# Altium PCB AVR_KBD.PcbDoc
Units mil, origin at the board's own origin, x right, y up, seen from the top; angles counter-clockwise.
Board outline 6000 x 4000 mil, 2 copper layers (Top Layer, Bottom Layer); 64 components, 79 nets, 255 pads, 0 vias.
Unrouted connection lines stored in the file: 164.
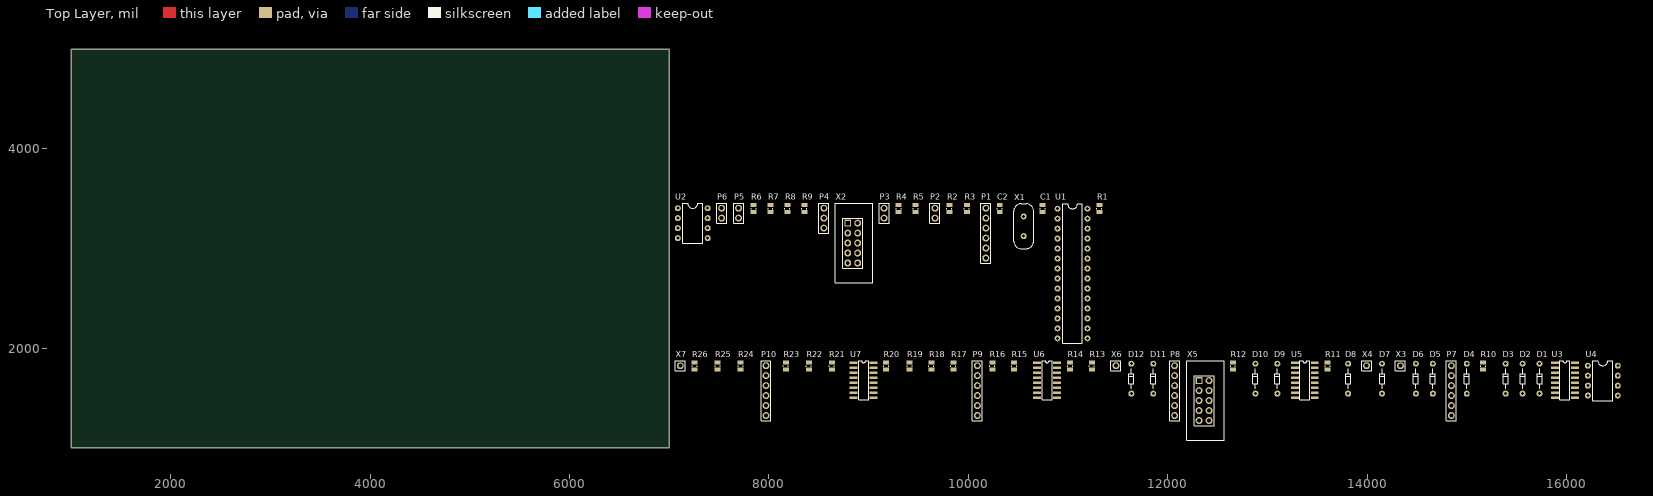
[diagram p0: Top Layer view]
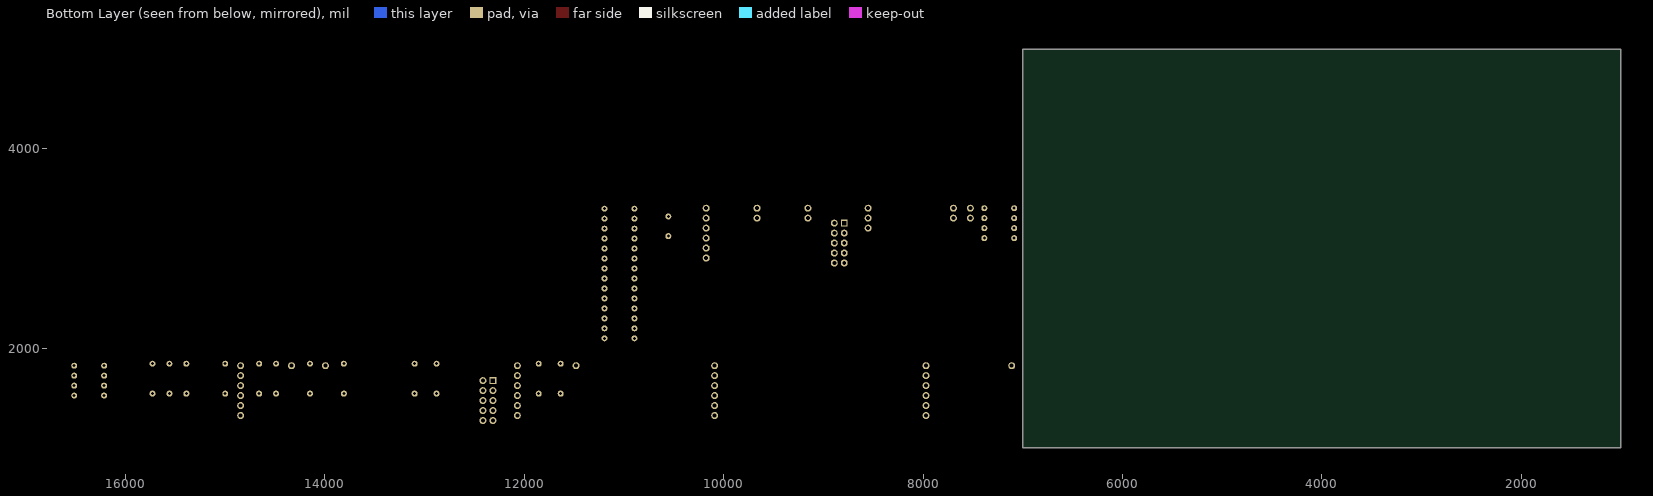
[diagram p1: Bottom Layer view, seen from below]

## Layer stack, top to bottom
Top Solder: solder mask 0.4, Solder Resist, Dk 3.5
Top Layer: signal copper 1.4
Dielectric1: dielectric 12.6, FR-4, Dk 4.8
Bottom Layer: signal copper 1.4
Bottom Solder: solder mask 0.4, Solder Resist, Dk 3.5

## Board outline
1000,1000 7000,1000 7000,5000 1000,5000

## Design rules (kind name [scope] priority, off if disabled: settings)
Clearance [All] p1: gap=10
FabricationTestPointUsage TestPointUsage [All] p1: valid=0 allowmultiple=FALSE
FabricationTestpoint Testpoint [All] p1: side=3 testpointundercomponent=TRUE minsize=40 maxsize=100 preferedsize=60 minholesize=0 maxholesize=40 preferedholesize=32 testpointgrid=1 allowsidetop=TRUE allowsidebottom=TRUE usegrid=TRUE gridtolerance=0.01
PolygonConnect [All] p1: connectstyle=Relief reliefconductorwidth=10 reliefentries=4 polygonreliefangle="90 Angle" airgapwidth=10
RoomDefinition AVR_MAIN [InComponentClass('AVR_MAIN')] p1: confinementstyle=ConfineIn formatcopy=TRUE lockcomponents=FALSE outline 7045,2035 11390,2035 11390,3565 7045,3565
RoomDefinition AVR_KBD [InComponentClass('AVR_KBD')] p2: confinementstyle=ConfineIn formatcopy=TRUE lockcomponents=FALSE outline 7045,1065 16555,1065 16555,1985 7045,1985
RoutingVias [All] p1: holewidth=28 width=50 viastyle="Through Hole" minholewidth=28 minwidth=50 maxholewidth=28 maxwidth=50
SilkToSolderMaskClearance SilkscreenOverComponentPads [IsPad] p1: minsilkscreentomaskgap=10 clearancetoexposedcopper=TRUE
SolderMaskExpansion [All] p1: expansion=4
Width [All] p1: maxlimit=10 minlimit=10 preferedwidth=10
26 further rules are at their usual default settings.

## Classes and differential pairs
component class AVR_MAIN: C1 C2 P1 P2 P3 P4 P5 P6 R1 R2 R3 R4 R5 R6 R7 R8 R9 U1 U2 X1 X2
component class AVR_KBD: D1 D2 D3 D4 D5 D6 D7 D8 D9 D10 D11 D12 P7 P8 P9 P10 R10 R11 R12 R13 R14 R15 R16 R17 R18 R19 R20 R21 R22 R23 R24 R25 R26 U3 U4 U5 U6 U7 X3 X4 X5 X6 X7

## Components (designator, comment, footprint, x,y, rotation, side; value= is the part's Value field where it differs from the comment)
C1 "Capacitor" 0805_Capacitor 10745,3440 r0 top
C2 "Capacitor" 0805_Capacitor 10315,3440 r0 top
D1 "Diode" DO35 15730,1545 r90 top
D2 "Diode" DO35 15560,1545 r90 top
D3 "Diode" DO35 15390,1545 r90 top
D4 "Diode" DO35 15000,1545 r90 top
D5 "Diode" DO35 14660,1545 r90 top
D6 "Diode" DO35 14490,1545 r90 top
D7 "Diode" DO35 14150,1545 r90 top
D8 "Diode" DO35 13810,1545 r90 top
D9 "Diode" DO35 13100,1545 r90 top
D10 "Diode" DO35 12880,1545 r90 top
D11 "Diode" DO35 11855,1545 r90 top
D12 "Diode" DO35 11635,1545 r90 top
P1 "SIL-CONN-6" SIL-CONN-6 10175,3405 r0 top
P2 "SIL-CONN-2" SIL-CONN-2 9665,3405 r0 top
P3 "SIL-CONN-2" SIL-CONN-2 9155,3405 r0 top
P4 "SIL-CONN-3" SIL-CONN-3 8550,3405 r0 top
P5 "SIL-CONN-2" SIL-CONN-2-jumper 7695,3405 r0 top
P6 "SIL-CONN-2" SIL-CONN-2 7525,3405 r0 top
P7 "KBD1" SIL-CONN-6 14845,1825 r0 top
P8 "KBD2" SIL-CONN-6 12070,1825 r0 top
P9 "LEDS1" SIL-CONN-6 10090,1825 r0 top
P10 "LEDS2" SIL-CONN-6 7970,1825 r0 top
R1 "Resistor" 0805_Resistor 11315,3440 r0 top
R2 "Resistor" 0805_Resistor 9810,3440 r0 top
R3 "Resistor" 0805_Resistor 9985,3440 r0 top
R4 "Resistor" 0805_Resistor 9300,3440 r0 top
R5 "Resistor" 0805_Resistor 9470,3440 r0 top
R6 "Resistor" 0805_Resistor 7845,3440 r0 top
R7 "Resistor" 0805_Resistor 8015,3440 r0 top
R8 "Resistor" 0805_Resistor 8185,3440 r0 top
R9 "Resistor" 0805_Resistor 8355,3440 r0 top
R10 "Resistor" 0805_Resistor 15165,1860 r0 top
R11 "Resistor" 0805_Resistor 13605,1860 r0 top
R12 "Resistor" 0805_Resistor 12655,1860 r0 top
R13 "Resistor" 0805_Resistor 11240,1860 r0 top
R14 "Resistor" 0805_Resistor 11020,1860 r0 top
R15 "Resistor" 0805_Resistor 10460,1860 r0 top
R16 "Resistor" 0805_Resistor 10240,1860 r0 top
R17 "Resistor" 0805_Resistor 9850,1860 r0 top
R18 "Resistor" 0805_Resistor 9630,1860 r0 top
R19 "Resistor" 0805_Resistor 9410,1860 r0 top
R20 "Resistor" 0805_Resistor 9175,1860 r0 top
R21 "Resistor" 0805_Resistor 8630,1860 r0 top
R22 "Resistor" 0805_Resistor 8400,1860 r0 top
R23 "Resistor" 0805_Resistor 8170,1860 r0 top
R24 "Resistor" 0805_Resistor 7715,1860 r0 top
R25 "Resistor" 0805_Resistor 7485,1860 r0 top
R26 "Resistor" 0805_Resistor 7255,1860 r0 top
U1 "ATMEGA8-PU" DIP28_Narrow 10895,3400 r0 top
U2 "24LC16B" DIP8 7085,3405 r0 top
U3 "74HC595" SOIC16 15885,1855 r0 top
U4 "ATTINY13A-PU" DIP8 16215,1825 r0 top
U5 "74HC595" SOIC16 13275,1855 r0 top
U6 "74HC595" SOIC16 10690,1855 r0 top
U7 "74HC595" SOIC16 8850,1855 r0 top
X1 "Crystal" HC49 10555,3325 r0 top
X2 "DIL-CONN-10" DIL-CONN-IDC-10 8790,3255 r0 top
X3 "KBD" SIL-CONN-1 14335,1825 r0 top
X4 "UART" SIL-CONN-1 13995,1825 r0 top
X5 "ISP" DIL-CONN-IDC-10 12315,1675 r0 top
X6 "MODE" SIL-CONN-1 11480,1825 r0 top
X7 "LED3" SIL-CONN-1 7110,1825 r0 top

## Footprints (in the part's own frame and the unit in brackets; to place one, negate y for a bottom-side part, rotate by r counter-clockwise, add the part's x,y. Pads: shape width x height; smd on the part's side, far side on the other; paste and mask are expansions set on the pad)
0805_Capacitor [mil]
  rect 60x40 smd: 1(0,-5) 2(0,-75)
  silkscreen extent -25,-45 25,-35, body extent -25,-79 25,-1, height 31
0805_Resistor [mil]
  rect 60x40 smd: 1(0,-5) 2(0,-75)
  silkscreen extent -25,-45 25,-35, body extent -25,-79 25,-1, height 31
DIL-CONN-IDC-10 [mil]
  rect 70x70 hole 40 square: 1(0,0)
  round 70 hole 40: 2(100,0) 3(0,-100) 4(100,-100) 5(0,-200) 6(100,-200) 7(0,-300) 8(100,-300) 9(0,-400) 10(100,-400)
  silkscreen extent -125,-600 250,200, body extent -123,-600 235,200, height 366
DIP8 [mil]
  round 60 hole 30: 1(0,0) 2(0,-100) 3(0,-200) 4(0,-300) 5(300,-300) 6(300,-200) 7(300,-100) 8(300,0)
  silkscreen extent 50,-350 250,50, body extent -4,-344 304,46, height 180
DIP28_Narrow [mil]
  round 60 hole 30: 1(0,0) 2(0,-100) 3(0,-200) 4(0,-300) 5(0,-400) 6(0,-500) 7(0,-600) 8(0,-700) 9(0,-800) 10(0,-900) 11(0,-1000) 12(0,-1100) 13(0,-1200) 14(0,-1300) 15(300,-1300) 16(300,-1200) 17(300,-1100) 18(300,-1000) 19(300,-900) 20(300,-800) 21(300,-700) 22(300,-600) 23(300,-500) 24(300,-400) 25(300,-300) 26(300,-200) 27(300,-100) 28(300,0)
  silkscreen extent 50,-1350 250,50, body extent -5,-1359 305,59, height 200
DO35 [mil]
  round 60 hole 30: A(0,0) K(300,0)
  silkscreen extent 50,-25 250,25, body extent -10,-40 310,40, height 87
HC49 [mil]
  round 60 hole 30: 1(0,-2) 2(0,-200)
  silkscreen extent -100,-325 100,125, body extent -91,-318 93,122, height 531
SIL-CONN-1 [mil]
  round 70 hole 40: 1(0,0)
  silkscreen extent -50,-50 50,50, body extent -50,-49 50,49, height 336
SIL-CONN-2 [mil]
  round 70 hole 40: 1(0,0) 2(0,-100)
  silkscreen extent -50,-150 50,50, body extent -48,-150 50,50, height 336
SIL-CONN-2-jumper [mil]
  round 70 hole 40: 1(0,0) 2(0,-100)
  silkscreen extent -50,-150 50,50, body extent -50,-150 50,50, height 356
SIL-CONN-3 [mil]
  round 70 hole 40: 1(0,0) 2(0,-100) 3(0,-200)
  silkscreen extent -50,-250 50,50, body extent -49,-250 49,50, height 336
SIL-CONN-6 [mil]
  round 70 hole 40: 1(0,0) 2(0,-100) 3(0,-200) 4(0,-300) 5(0,-400) 6(0,-500)
  silkscreen extent -50,-550 50,50, body extent -49,-550 49,50, height 336
SOIC16 [mil]
  rect 80x25 smd: 1(0,0) 2(0,-50) 3(0,-100) 4(0,-150) 5(0,-200) 6(0,-250) 7(0,-300) 8(0,-350) 9(200,-350) 10(200,-300) 11(200,-250) 12(200,-200) 13(200,-150) 14(200,-100) 15(200,-50) 16(200,0)
  silkscreen extent 50,-370 150,20, body extent -14,-368 214,18, height 69

## Part data
P7 P8 P9 P10: library part SIL-CONN-6
X3 X4 X6 X7: library part SIL-CONN-1
X5: library part DIL-CONN-10

## Nets (pads, with @x,y where several pads share a name; then routed paths per layer and width w, separated by ;. In a path a pad name is that pad's centre, name@x,y a point inside that pad or via, vN(x,y) a via of type N, cw(c..) or ccw(c..) an arc to the next point about the centre after c; other vN are vias at no path point)
DS: U3.14 U4.2
ENC1: P4.1 R4.1 U1.12
ENC2: P4.3 R5.1 U1.13
I2C_SCK: R7.1 U1.4 U2.6
I2C_SDA: R8.1 U1.5 U2.5
KBD: P6.1 R6.1 R10.1 U1.15 U1.18 U4.6 X2.9 X3.1 X5.9
M\R\: R23.1 U3.10 U5.10 U6.10 U7.10
MODE: P6.2 R9.1 U1.14
MOSI: P2.2 R3.1 R11.2 U1.3 U1.17 U4.5 X2.1 X4.1 X5.1
NetD1_A: D1.A P7.1
NetD1_K: D1.K U3.15
NetD2_A: D2.A P7.2
NetD2_K: D2.K U3.1
NetD3_A: D3.A P7.3
NetD3_K: D3.K U3.2
NetD4_A: D4.A P7.4
NetD4_K: D4.K U3.3
NetD5_A: D5.A P7.5
NetD5_K: D5.K U3.4
NetD6_A: D6.A P7.6
NetD6_K: D6.K U3.5
NetD7_A: D7.A P8.1
NetD7_K: D7.K U3.6
NetD8_A: D8.A P8.2
NetD8_K: D8.K U3.7
NetD9_A: D9.A P8.3
NetD9_K: D9.K U5.15
NetD10_A: D10.A P8.4
NetD10_K: D10.K U5.1
NetD11_A: D11.A P8.5
NetD11_K: D11.K U5.2
NetD12_A: D12.A P8.6
NetD12_K: D12.K U5.3
NetP1_1: P1.1 U1.23
NetP1_2: P1.2 U1.24
NetP1_3: P1.3 U1.25
NetP1_4: P1.4 U1.26
NetP1_5: P1.5 U1.27
NetP1_6: P1.6 U1.28
NetP9_1: P9.1 R13.1
NetP9_2: P9.2 R14.1
NetP9_3: P9.3 R15.1
NetP9_4: P9.4 R16.1
NetP9_5: P9.5 R17.1
NetP9_6: P9.6 R18.1
NetP10_1: P10.1 R19.1
NetP10_2: P10.2 R20.1
NetP10_3: P10.3 R21.1
NetP10_4: P10.4 R22.1
NetP10_5: P10.5 R24.1
NetP10_6: P10.6 R25.1
NetR13_2: R13.2 U6.15
NetR14_2: R14.2 U6.1
NetR15_2: R15.2 U6.2
NetR16_2: R16.2 U6.3
NetR17_2: R17.2 U6.4
NetR18_2: R18.2 U6.5
NetR19_2: R19.2 U6.6
NetR20_2: R20.2 U6.7
NetR21_2: R21.2 U7.15
NetR22_2: R22.2 U7.1
NetR24_2: R24.2 U7.2
NetR25_2: R25.2 U7.3
NetR26_1: R26.1 X7.1
NetR26_2: R26.2 U7.4
NetU3_9: U3.9 U5.14
NetU5_4: U5.4 X6.1
NetU5_9: U5.9 U6.14
NetU6_9: U6.9 U7.14
O\E\: C1.1 C2.1 P3.2 P4.2 P5.2 U1.8 U1.22 U2.1 U2.2 U2.3 U2.4 U2.7 U3.8 U3.13 U4.4 U5.8 U5.13 U6.8 U6.13 U7.8 U7.13 X2.4 X2.6 X2.8 X2.10 X5.4 X5.6 X5.8 X5.10
R\E\S\E\T: R12.1 X5.5
R\E\S\E\T\: R1.1 U1.1 U4.1 X2.5
RST: P5.1 U1.16
SCK: U1.19 U3.11 U4.7 U5.11 U6.11 U7.11 X2.7 X5.7
ST: U3.12 U4.3 U5.12 U6.12 U7.12
UART_RX: P2.1 R2.1 U1.2
VCC: P3.1 R1.2 R2.2 R3.2 R4.2 R5.2 R6.2 R7.2 R8.2 R9.2 R10.2 R11.1 R12.2 R23.2 U1.7 U1.20 U2.8 U3.16 U4.8 U5.16 U6.16 U7.16 X2.2 X5.2
X1: C1.2 U1.9 X1.2
X2: C2.2 U1.10 X1.1
pads on no net: U1.6 U1.11 U1.21 U5.5 U5.6 U5.7 U7.5 U7.6 U7.7 U7.9 X2.3 X5.3